# Altium PCB PCB2.PcbDoc
Units mm, origin at the board's own origin, x right, y up, seen from the top; angles counter-clockwise.
Board outline 52.5 x 30.5 mm, 2 copper layers (Top Layer, Bottom Layer), stack 0.8 mm thick; 43 components, 37 nets, 192 pads, 123 vias.
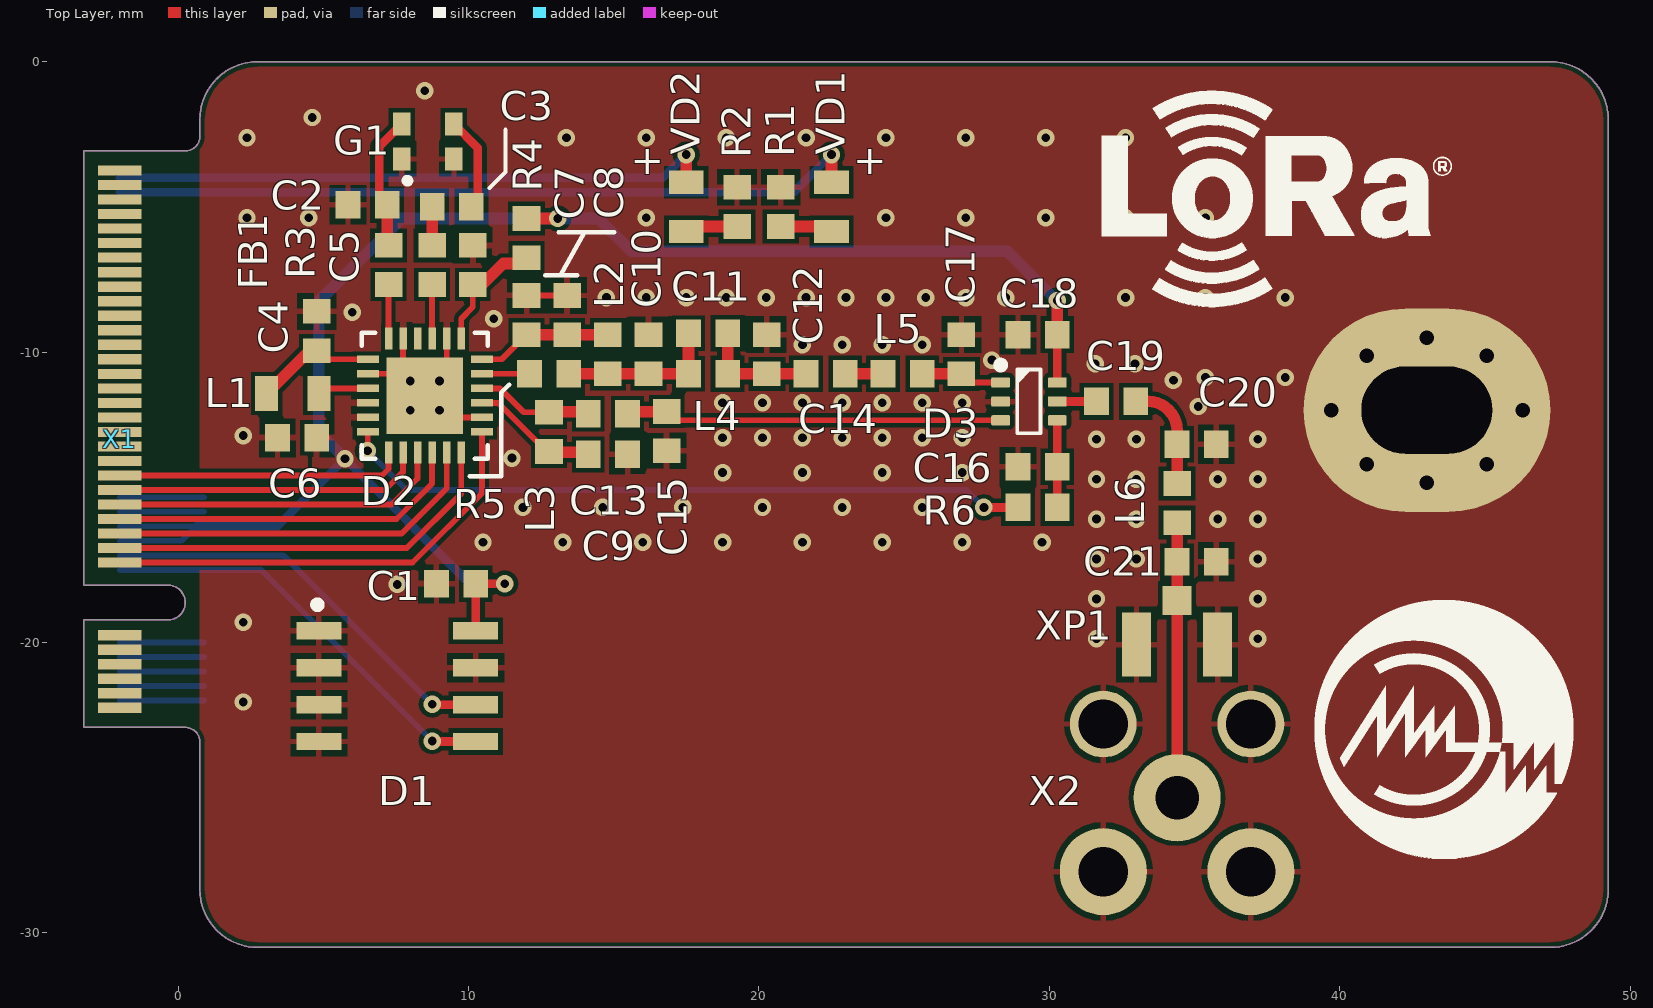
[diagram p0: Top Layer view]
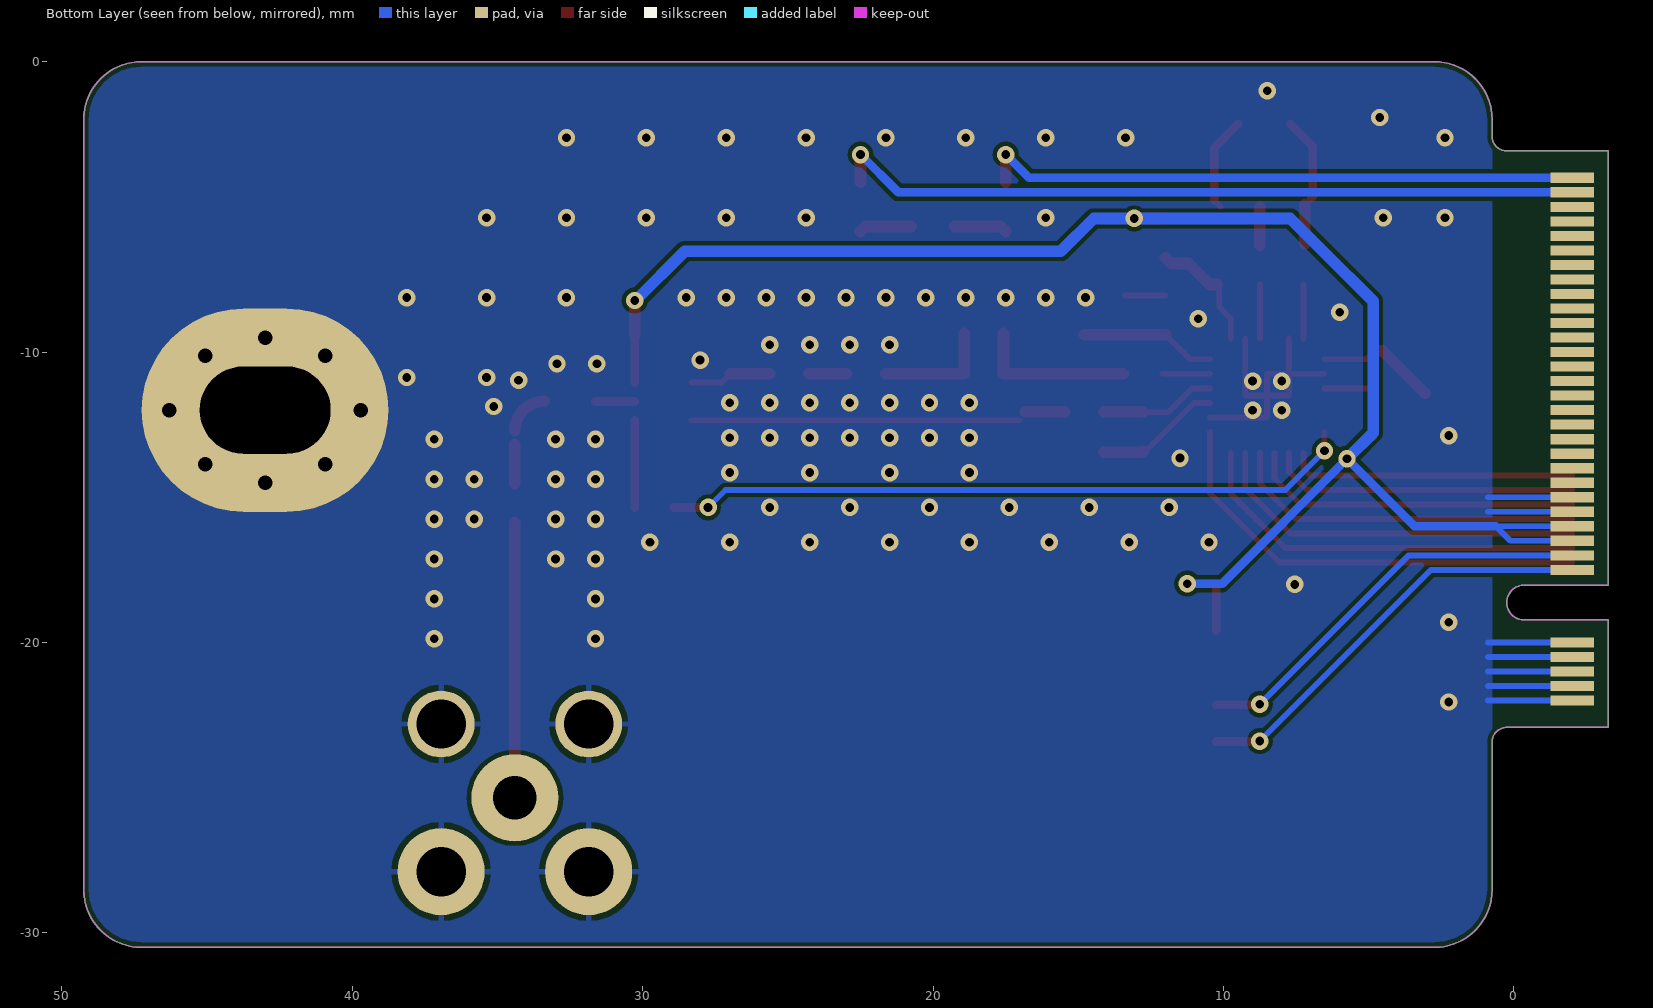
[diagram p1: Bottom Layer view, seen from below]
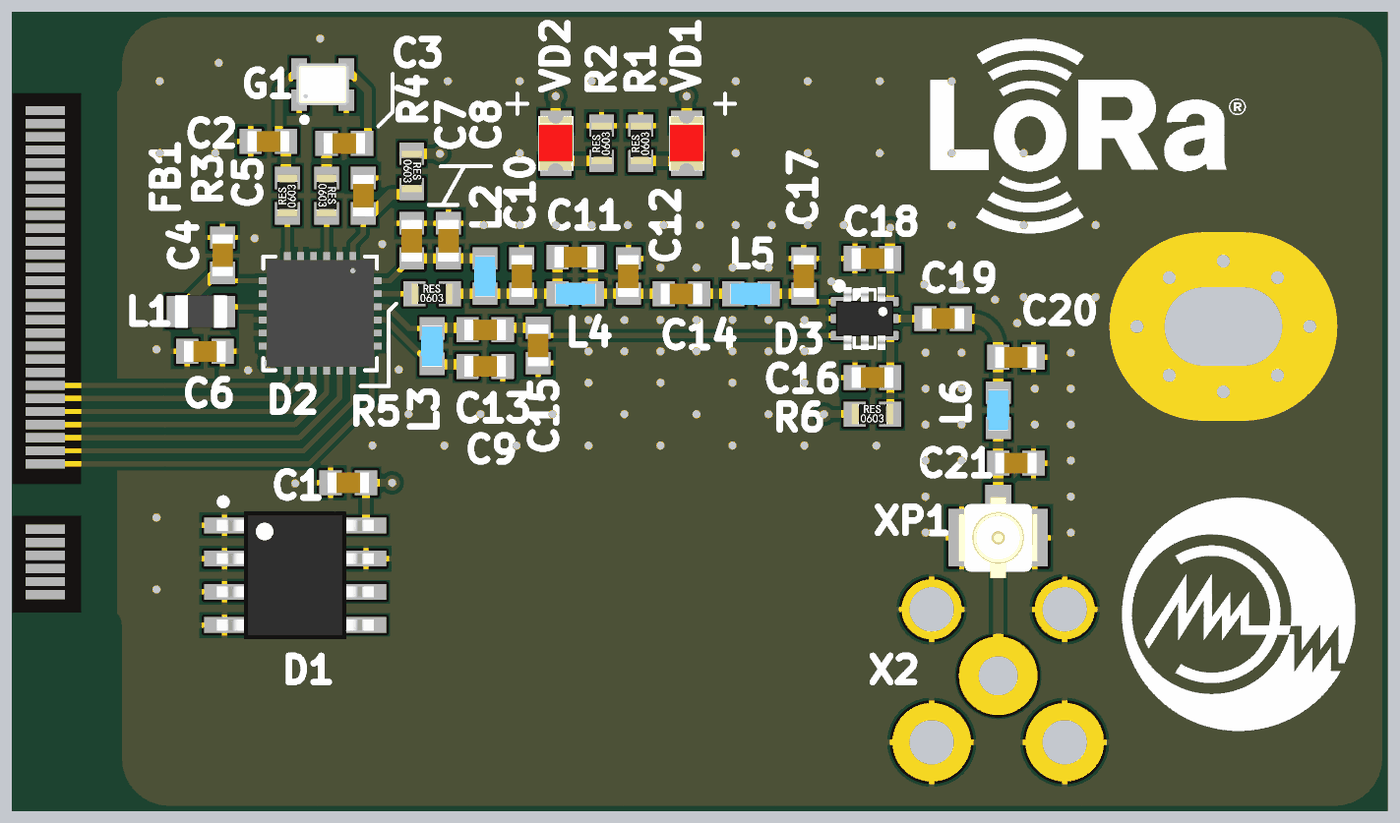
[diagram p2: 3D render of the assembled board from above, using the file's embedded part models]

## Layer stack, top to bottom
Top Solder: solder mask 0.01, Solder Resist, Dk 3.5
Top Layer: signal copper 0.035
Dielectric 1: dielectric 0.73, FR-4, Dk 4.6
Bottom Layer: signal copper 0.035
Bottom Solder: solder mask 0.01, Solder Resist, Dk 3.5

## Board outline
-3.25,-19.225 -0.35,-19.225 ccw(c-0.35,-18.625) -0.35,-18.025 -3.25,-18.025 -3.25,-3.075 0.25,-3.075 ccw(c0.25,-2.575) 0.75,-2.575 0.75,-2 cw(c2.75,-2) 2.75,0 47.25,0 cw(c47.25,-2) 49.25,-2 49.25,-28.5 cw(c47.25,-28.5) 47.25,-30.5 2.75,-30.5 cw(c2.75,-28.5) 0.75,-28.5 0.75,-23.425 ccw(c0.25,-23.425) 0.25,-22.925 -3.25,-22.925

## Design rules (kind name [scope] priority, off if disabled: settings)
Clearance [All] p1: gap=0.15 ignorepadtopadclearanceinfootprint=FALSE except(0: Arc-Hole Track-Hole SMDPad-Hole THPad-Hole Via-Hole Fill-Hole Poly-Hole Region-Hole Text-Hole)
ComponentClearance [All] p1: gap=0 collisioncheckmode=3 verticalgap=0.254 showdistances=FALSE
HoleSize [All] p1: absolutevalues=TRUE maxlimit=10 minlimit=0.3 maxpercent=80.000 minpercent=20.000
MinimumSolderMaskSliver [All] p1: minsoldermaskwidth=0.15
PolygonConnect PolygonConnect_1 [All vs (InNamedUnion('Mounting pad'))] p1: connectstyle=Direct reliefconductorwidth=0.254 reliefentries=4 polygonreliefangle="90 Angle" airgapwidth=0.254
PolygonConnect [All vs IsVia] p2: connectstyle=Direct reliefconductorwidth=0.2 reliefentries=4 polygonreliefangle="90 Angle" airgapwidth=0.2
PolygonConnect PolygonConnect_2 [All] p3: connectstyle=Relief reliefconductorwidth=0.2 reliefentries=4 polygonreliefangle="90 Angle" airgapwidth=0.2
RoutingVias [All] p1: holewidth=0.3 width=0.6 viastyle="Through Hole" minholewidth=0.3 minwidth=0.6 maxholewidth=0.6 maxwidth=1
SilkToSilkClearance [All] p1: silktosilkclearance=0
SilkToSolderMaskClearance [IsPad] p1: minsilkscreentomaskgap=0 clearancetoexposedcopper=TRUE
SolderMaskExpansion [All] p1: expansion=0.102 istentingtop=FALSE
Width [All] p1: maxlimit=0.5 minlimit=0.2 preferedwidth=0.2
25 further rules are at their usual default settings.

## Classes and differential pairs
component class Sheet1: C1 C2 C3 D1 FB1 G1 R1 R2 R3 VD1 VD2 X1 X2 XP1
component class Sheet2: C4 C5 C6 C7 C8 C9 C10 C11 C12 C13 C14 C15 C16 C17 C18 C19 C20 C21 D2 D3 L1 L2 L3 L4 L5 L6 R4 R5 R6

## Components (designator, comment, footprint, x,y, rotation, side; value= is the part's Value field where it differs from the comment)
C1 "C" С0603 9.575,-17.975 r180 top value="1 мк"
C2 "C" С0603 6.525,-4.925 r180 top value=0,1мк
C3 "C" С0603 9.425,-5 r180 top value="10 пФ"
C4 "C" С0603 4.775,-9.275 r270 top value=0,47мк
C5 "C" С0603 10.15,-7 r90 top value=1мк
C6 "C" С0603 4.1,-12.95 r180 top value=0,1мк
C7 "C" С0603 12,-8.725 r90 top value=47н
C8 "C" С0603 13.4,-8.725 r90 top value="47 п"
C9 "C" С0603 14.8,-13.525 r0 top value="1,8 п"
C10 "C" С0603 16.2,-10.075 r90 top value="5,6 п"
C11 "C" С0603 18.25,-9.35 r0 top value="3,3 п"
C12 "C" С0603 20.275,-10.075 r90 top value="5,6 п"
C13 "C" С0603 14.8,-12.125 r0 top value="2,4 п"
C14 "C" С0603 22.3,-10.75 r0 top value="39 п"
C15 "C" С0603 16.825,-12.725 r90 top value="2,2 п"
C16 "C" С0603 29.6,-13.95 r180 top value=1н
C17 "C" С0603 26.975,-10.075 r270 top value="2,2 п"
C18 "C" С0603 29.6,-9.4 r180 top value=0,1мк
C19 "C" С0603 32.3,-11.7 r0 top value="39 п"
C20 "C" С0603 35.075,-13.175 r0 top value="3,3 п"
C21 "C" С0603 35.075,-17.225 r0 top value="3,3 п"
D1 "AT24MAC402 SOIC-8" SOIC8 4.85,-19.6 r0 top
D2 "SX126x" QFN24_4X4_SEM 8.5,-11.5 r270 top
D3 "PE4259 SC-70" SC70-6 29.3,-11.7 r0 top
FB1 "Ferrite_Beads" R0603 7.25,-7 r90 top value=BLM18PG181SN1D
G1 "32MHz" OSC_2016 8.6,-2.75 r0 top value="NT2016SA 32MHz END4263A"
L1 "L" IND_0805 3.95,-11.425 r0 top value=15мк
L2 "L" INDC_0603 14.8,-10.075 r90 top value=47н
L3 "L" INDC_0603 12.775,-12.75 r90 top value=15н
L4 "L" INDC_0603 18.25,-10.75 r0 top value=2,5н
L5 "L" INDC_0603 24.95,-10.75 r0 top value=4,7н
L6 "L" INDC_0603 34.4,-15.2 r270 top value=9,1н
R1 "R" R0603 20.75,-5 r90 top value=220
R2 "R" R0603 19.25,-5 r90 top value=220
R3 "R" R0603 8.75,-7 r270 top value=220
R4 "R" R0603 12,-6.075 r270 top value=0
R5 "R" R0603 12.775,-10.75 r0 top value=0
R6 "R" R0603 29.6,-15.35 r0 top value=100
VD1 "LED" LED_0805 22.5,-5 r270 top
VD2 "LED" LED_0805 17.5,-5 r270 top
X1 "M.2" M.2_EDGE 0.75,-2.275 r90 top locked
X2 "SMA" SMA_kont 34.4,-25.349 r180 top
XP1 "IPEX" IPEX 34.4,-20.075 r90 top

## Footprints (in the part's own frame and the unit in brackets; to place one, negate y for a bottom-side part, rotate by r counter-clockwise, add the part's x,y. Pads: shape width x height; smd on the part's side, far side on the other; paste and mask are expansions set on the pad)
IND_0805 [mm]
  rect 0.8x1.2 smd: 1(-0.9,0) 2(0.9,0)
  body extent -1,-0.62 1,0.63, height 1.25
INDC_0603 [mm] "Chip Inductor, 2-Leads, Body 1,60x1,00mm, IPC Medium Density"
  rect 0.85x0.95 smd: 1(-0.675,0) 2(0.675,0)
  body extent -0.78,-0.42 0.79,0.42, height 0.59
IPEX [mm]
  rect 1x1 smd: 1(1.524,0)
  rect 2.2x1 smd: 2(0,1.397) 2(0,-1.397)
  body extent -1.55,-1.5 1.55,1.5, height 1.25
LED_0805 [mm]
  rect 0.8x1.2 smd: 1(-0.85,0) 2(0.85,0)
  body extent -1.05,-0.67 1.05,0.68, height 0.9
M.2_EDGE [mm]
  rect 0.35x1.5 smd: 1(-19.975,2.75) 2(-19.475,2.75) 3(-18.975,2.75) 4(-18.475,2.75) 5(-17.975,2.75) 6(-17.475,2.75) 7(-14.975,2.75) 8(-14.475,2.75) 9(-13.975,2.75) 10(-13.475,2.75) 11(-12.975,2.75) 12(-12.475,2.75) 13(-11.975,2.75) 14(-11.475,2.75) 15(-10.975,2.75) 16(-10.475,2.75) 17(-9.975,2.75) 18(-9.475,2.75) 19(-8.975,2.75) 20(-8.475,2.75) 21(-7.975,2.75) 22(-7.475,2.75) 23(-6.975,2.75) 24(-6.475,2.75) 25(-5.975,2.75) 26(-5.475,2.75) 27(-4.975,2.75) 28(-4.475,2.75) 29(-3.975,2.75) 30(-3.475,2.75) 31(-2.975,2.75) 32(-2.475,2.75) 33(-1.975,2.75) 34(-1.475,2.75)
  rect 0.35x1.5 smd far side: 35(-1.725,2.75) 36(-2.225,2.75) 37(-2.725,2.75) 38(-3.225,2.75) 39(-3.725,2.75) 40(-4.225,2.75) 41(-4.725,2.75) 42(-5.225,2.75) 43(-5.725,2.75) 44(-6.225,2.75) 45(-6.725,2.75) 46(-7.225,2.75) 47(-7.725,2.75) 48(-8.225,2.75) 49(-8.725,2.75) 50(-9.225,2.75) 51(-9.725,2.75) 52(-10.225,2.75) 53(-10.725,2.75) 54(-11.225,2.75) 55(-11.725,2.75) 56(-12.225,2.75) 57(-12.725,2.75) 58(-13.225,2.75) 59(-13.725,2.75) 60(-14.225,2.75) 61(-14.725,2.75) 62(-15.225,2.75) 63(-17.725,2.75) 64(-18.225,2.75) 65(-18.725,2.75) 66(-19.225,2.75) 67(-19.725,2.75)
  Keep-Out Layer lines w0.05: -21.45,0 -21.15,0 ccw(c-21.15,0.5) -20.65,0.5 -20.65,4 -16.95,4 -16.95,1.1 ccw(c-16.35,1.1) -15.75,1.1 -15.75,4 -0.8,4 -0.8,0.5 ccw(c-0.3,0.5) -0.3,0 0,0
OSC_2016 [mm]
  rect 0.6x0.8 smd: 1(0.9,-0.6) 2(-0.9,-0.6) 3(-0.9,0.6) 4(0.9,0.6)
  silkscreen extent -0.8,-1.45 -0.6,-1.25, body extent -1,-0.8 1,0.8, height 0.7
QFN24_4X4_SEM [mm]
  rect 0.757x0.255 smd paste+0 mask+0: 1(-1.966,1.25) 2(-1.966,0.75) 3(-1.966,0.25) 4(-1.966,-0.25) 5(-1.966,-0.75) 6(-1.966,-1.25) 13(1.966,-1.25) 14(1.966,-0.75) 15(1.966,-0.25) 16(1.966,0.25) 17(1.966,0.75) 18(1.966,1.25)
  rect 0.255x0.757 smd paste+0 mask+0: 7(-1.25,-1.966) 8(-0.75,-1.966) 9(-0.25,-1.966) 10(0.25,-1.966) 11(0.75,-1.966) 12(1.25,-1.966) 19(1.25,1.966) 20(0.75,1.966) 21(0.25,1.966) 22(-0.25,1.966) 23(-0.75,1.966) 24(-1.25,1.966)
  rect 2.642x2.642 smd paste-1.308 mask+0: 25(0,0)
  silkscreen extent -2.17,-2.17 2.17,2.17, body extent -2.04,-2.04 2.05,2.05, height 0.99
R0603 [mm]
  rect 0.85x0.95 smd: 1(-0.675,0) 2(0.675,0)
  body extent -0.8,-0.4 0.8,0.4, height 0.45
SC70-6 [mm] "SC70-6; SOT-363"
  round 0.254 on Mech15: 0(0,0)
  rrect25% 0.65x0.35 smd mask+0.07: 1(-0.975,0.65) 2(-0.975,0) 3(-0.975,-0.65) 4(0.975,-0.65) 5(0.975,0) 6(0.975,0.65)
  silkscreen extent -1.1,-1.1 0.4,1.38, body extent -1.2,-1.1 1.2,1.1, height 1.1
SMA_kont [mm]
  round 3 hole 1.5: 1(0,0)
  round 3 hole 1.7: 2(-2.54,2.54) 2(2.54,2.54)
  round 2.3 hole 1.7: 2(-2.54,-2.54) 2(2.54,-2.54)
SOIC8 [mm]
  rect 1.55x0.6 smd: 1(0,0) 2(0,-1.27) 3(0,-2.54) 4(0,-3.81) 5(5.4,-3.81) 6(5.4,-2.54) 7(5.4,-1.27) 8(5.4,0)
  Top Layer region: 0,0 0,0 0,0 0,0
  body extent -0.3,-4.36 5.7,0.54, height 1.75
С0603 [mm]
  rect 0.85x0.95 smd: 1(-0.675,0) 2(0.675,0)
  body extent -0.8,-0.4 0.8,0.4, height 0.9

## Part data
C1 C2 C6 C7 C18: Voltage="16 В"
C3 C8 C9 C10 C11 C13 C14 C15 C17 C19 C20 C21: Voltage="50 В"
C4 C5 C16: Voltage="10 В"
C12: Voltage=50
D1: library part AT24MAC402
D3: library part PE4259
G1: library part TCXO
VD1 VD2: library part VD_LED, Voltage=?
X2 XP1: library part 2pin

## Free pads (board coordinates)
  rrect100% 8.5x7 hole 3 slot 4.5 at 0 deg: 0(43,-12)

## Via types
v1: diameter 0.6, hole 0.3, Top Layer to Bottom Layer, tented both sides, 115 vias
v2: diameter 0.7, hole 0.5, Top Layer to Bottom Layer, tented both sides, 8 vias

## Nets (pads, with @x,y where several pads share a name; then routed paths per layer and width w, separated by ;. In a path a pad name is that pad's centre, name@x,y a point inside that pad or via, vN(x,y) a via of type N, cw(c..) or ccw(c..) an arc to the next point about the centre after c; other vN are vias at no path point)
3V3: C1.1 C6.1 C18.1 D1.8 D2.10 D2.11 D3.6 R4.1 X1.59 X1.60 | length 59.3
  Top Layer w0.2: C6.1@4.825,-12.95 C6.1@5.125,-12.95
  Top Layer w0.3: D1.8 C1.1 v1(11.25,-17.975) ; D3.6 C18.1
  Top Layer w0.4: R4.1 v1(13.075,-5.4) ; C18.1 v1(30.275,-8.225)
  Bottom Layer w0.2: X1.60 0.125,-16.5 0.625,-16 X1.59
  Bottom Layer w0.3: 0.625,-16 3.425,-16 v1(5.75,-13.675) 10.05,-17.975 v1(11.25,-17.975) ; 6.575,-6.525 6.65,-6.525
  Bottom Layer w0.4: v1(5.75,-13.675) 4.85,-12.775 4.85,-8.25 6.575,-6.525 7.7,-5.4 v1(13.075,-5.4) 14.475,-5.4 15.6,-6.525 28.55,-6.525 30.25,-8.225 v1(30.275,-8.225)
ANT: C21.1 L6.2 X2.1 XP1.1 | length 9.3
  Top Layer w0.4: X2.1@34.4,-25.174 C21.1 L6.2
EEPROM_SCL: D1.6 X1.61 | length 14.4
  Top Layer w0.3: v1(8.75,-22.125) 8.765,-22.14 D1.6
  Bottom Layer w0.2: X1.61 3.625,-17 v1(8.75,-22.125)
EEPROM_SDA: D1.5 X1.62 | length 14.7
  Top Layer w0.3: v1@8.765,-23.41 D1.5
  Bottom Layer w0.2: X1.62 2.855,-17.5 v1(8.75,-23.395)
GND: C1.2 C2.2 C4.1 C5.2 C6.2 C7.2 C8.2 C9.2 C10.2 C12.2 C15.1 C16.2 C17.1 C18.2 C20.2 C21.2 D1.1 D1.2 D1.3 D1.4 D1.7 D2.2 D2.5 D2.8 D2.20 D2.25 D3.2 G1.1 G1.2 pad.0 R1.2 R2.2 X1.57 X1.58 X1.63 X1.64 X1.65 X1.66 X1.67 X2.2 XP1.2 | length 32.6
  Top Layer w0.2: D2.8 D2.25@7.75,-10.75 ; D2.5 D2.25@7.75,-10.75 ; D2.2 9.25,-11.5 D2.25 ; D2.20 8.5,-12.25 D2.25 ; C7.2 C8.2 ; D2.25@7.75,-10.75 7.75,-11.5 D2.25 ; D2.25@7.75,-10.75 8.5,-10.75 D2.25
  Bottom Layer w0.2: X1.67 0.9,-22 ; X1.66 0.9,-21.5 ; X1.65 0.9,-21 ; X1.64 0.9,-20.5 ; X1.63 0.9,-20 ; X1.58 0.9,-15.5 ; X1.57 0.9,-15
  other v1: 2.25,-22.05 31.625,-19.875 37.175,-19.875 2.25,-19.3 31.625,-18.5 37.175,-18.5 7.55,-18 31.625,-17.125 33,-17.125 37.175,-17.125 10.5,-16.55 13.25,-16.55 16,-16.55 18.75,-16.55 21.5,-16.55 24.25,-16.55 27,-16.55 29.75,-16.55 31.625,-15.75 33,-15.75 35.8,-15.75 37.175,-15.75 11.875,-15.35 14.625,-15.35 17.375,-15.35 20.125,-15.35 22.875,-15.35 25.625,-15.35 31.625,-14.375 33,-14.375 35.8,-14.375 37.175,-14.375 18.75,-14.15 21.5,-14.15 24.25,-14.15 27,-14.15 11.5,-13.65 31.625,-13 33,-13 37.175,-13 18.75,-12.95 20.125,-12.95 21.5,-12.95 22.875,-12.95 24.25,-12.95 25.625,-12.95 27,-12.95 2.25,-12.875 8,-12 9,-12 35.125,-11.875 18.75,-11.75 20.125,-11.75 21.5,-11.75 22.875,-11.75 24.25,-11.75 25.625,-11.75 27,-11.75 8,-11 9,-11 34.275,-10.975 35.375,-10.875 38.125,-10.875 31.575,-10.4 32.95,-10.4 28.025,-10.275 21.5,-9.75 22.875,-9.75 24.25,-9.75 25.625,-9.75 10.875,-8.85 6,-8.625 14.75,-8.125 16.125,-8.125 17.5,-8.125 18.875,-8.125 20.25,-8.125 21.625,-8.125 23,-8.125 24.375,-8.125 25.75,-8.125 27.125,-8.125 28.5,-8.125 32.625,-8.125 35.375,-8.125 38.125,-8.125 2.375,-5.375 4.5,-5.375 16.125,-5.375 24.375,-5.375 27.125,-5.375 29.875,-5.375 32.625,-5.375 35.375,-5.375 2.375,-2.625 13.375,-2.625 16.125,-2.625 18.875,-2.625 21.625,-2.625 24.375,-2.625 27.125,-2.625 29.875,-2.625 32.625,-2.625 4.625,-1.925 8.5,-1
  other v2: 43,-14.5 40.932,-13.868 45.068,-13.868 39.7,-12 46.3,-12 40.932,-10.132 45.068,-10.132 43,-9.5
LED1: VD1.1 X1.36 | length 26
  Top Layer w0.4: VD1.1 v1(22.5,-3.2)
  Bottom Layer w0.3: X1.36 21.2,-4.5 v1(22.5,-3.2)
LED2: VD2.1 X1.35 | length 20.8
  Top Layer w0.4: VD2.1 v1(17.5,-3.2)
  Bottom Layer w0.3: X1.35 16.7,-4 v1(17.5,-3.2)
LORA_BUSY: D2.14 X1.12 | length 10.7
  Top Layer w0.2: X1.12 7.125,-14.75 7.75,-14.125 D2.14
LORA_DIO1: D2.13 X1.13 | length 9.9
  Top Layer w0.2: X1.13 7.025,-14.25 7.25,-14.025 D2.13
LORA_MISO: D2.16 X1.10 | length 12.3
  Top Layer w0.2: X1.10 7.525,-15.75 8.75,-14.525 D2.16
LORA_MOSI: D2.17 X1.9 | length 13.1
  Top Layer w0.2: X1.9 7.7,-16.25 9.25,-14.7 D2.17
LORA_NRST: D2.15 X1.11 | length 11.5
  Top Layer w0.2: X1.11 7.35,-15.25 8.25,-14.35 D2.15
LORA_NSS: D2.19 X1.7 | length 15.6
  Top Layer w0.2: X1.7 8.075,-17.25 10.466,-14.859 D2.19
LORA_SCK: D2.18 X1.8 | length 13.9
  Top Layer w0.2: X1.8 7.875,-16.75 9.75,-14.875 D2.18
NetC2_1: C2.1 FB1.2 G1.3 | length 4.6
  Top Layer w0.2: C2.1@6.975,-4.7 C2.1 ; FB1.2@7.2,-6.275 FB1.2
  Top Layer w0.3: C2.1@6.975,-4.7 6.925,-4.65 6.925,-2.925 G1.3
  Top Layer w0.4: FB1.2@7.2,-6.275 C2.1
NetC3_1: C3.1 G1.4 | length 3.3
  Top Layer w0.2: C3.1 C3.1@10.325,-4.775
  Top Layer w0.3: G1.4 10.325,-2.975 C3.1@10.325,-4.775
NetC3_2: C3.2 R3.1 | length 1.3
  Top Layer w0.4: R3.1 C3.2
NetC4_2: C4.2 D2.7 L1.1 | length 4.2
  Top Layer w0.2: C4.2 5.075,-10.25 D2.7
  Top Layer w0.4: L1.1 4.525,-9.95 C4.2
NetC5_1: C5.1 D2.1 R4.2 | length 4.3
  Top Layer w0.2: D2.1 9.75,-8.85 10.15,-8.45 C5.1 C5.1@10.225,-7.675
  Top Layer w0.4: C5.1@10.225,-7.675 10.475,-7.675 11.2,-6.95 11.8,-6.95 R4.2
NetC7_1: C7.1 C8.1 D2.24 L2.2 | length 4.7
  Top Layer w0.2: D2.24 11.15,-10.25 C7.1
  Top Layer w0.4: C7.1 C8.1 L2.2
NetC9_1: C9.1 D2.21 L3.1 | length 4.4
  Top Layer w0.2: D2.21 11.025,-11.75 12.7,-13.425 L3.1
  Top Layer w0.4: L3.1 12.8,-13.45 C9.1@14.125,-13.45
NetC10_1: C10.1 C11.1 L2.1 L4.1 R5.2 | length 5.5
  Top Layer w0.4: R5.2 L2.1 C10.1 L4.1 C11.1
NetC11_2: C11.2 C12.1 C14.1 L4.2 | length 4.1
  Top Layer w0.4: C11.2 L4.2 C12.1 C14.1
NetC13_1: C13.1 D2.22 L3.2 | length 4
  Top Layer w0.2: D2.22 11.075,-11.25 11.9,-12.075 L3.2
  Top Layer w0.4: L3.2 12.8,-12.05 C13.1@14.125,-12.05
NetC13_2: C13.2 C15.2 D3.3 | length 12.7
  Top Layer w0.2: C15.2@17.025,-12.35 D3.3
  Top Layer w0.4: C13.2@15.475,-12.05 C15.2
NetC14_2: C14.2 L5.1 | length 1.3
  Top Layer w0.4: C14.2 L5.1
NetC16_1: C16.1 D3.4 R6.2 | length 3
  Top Layer w0.3: R6.2 C16.1 D3.4
NetC17_2: C17.2 D3.1 L5.2 | length 2.8
  Top Layer w0.2: C17.2 27.275,-11.05 D3.1
  Top Layer w0.4: L5.2 C17.2
NetC19_1: C19.1 D3.5 | length 1.3
  Top Layer w0.3: D3.5 C19.1
NetC19_2: C19.2 C20.1 L6.1 | length 2.9
  Top Layer w0.4: C19.2@33.4,-11.7 cw(c33.4,-12.7) 34.4,-12.7 ; L6.1 C20.1
NetD2_9: D2.9 L1.2 | length 1.8
  Top Layer w0.2: L1.2 5.025,-11.25 D2.9
NetD2_12: D2.12 R6.1 | length 23.9
  Top Layer w0.2: v1@6.5,-13.425 v1(6.525,-13.4) 6.525,-13.25 6.534,-13.241 D2.12
  Top Layer w0.3: v1(27.75,-15.35) R6.1
  Bottom Layer w0.2: v1(6.525,-13.4) 7.875,-14.75 27.15,-14.75 v1(27.75,-15.35)
NetD2_23: D2.23 R5.1 | length 1.6
  Top Layer w0.2: D2.23 R5.1
NetR1_1: R1.1 VD1.2 | length 1.8
  Top Layer w0.4: R1.1 22.325,-5.675 VD1.2
NetR2_1: R2.1 VD2.2 | length 1.8
  Top Layer w0.4: VD2.2 17.675,-5.675 R2.1
TCXO_VDD: D2.6 FB1.1 | length 1.9
  Top Layer w0.2: D2.6 FB1.1
XTA: D2.3 R3.2 | length 1.9
  Top Layer w0.2: D2.3 R3.2
pads on no net: D2.4 D3.0 X1.1 X1.2 X1.3 X1.4 X1.5 X1.6 X1.14 X1.15 X1.16 X1.17 X1.18 X1.19 X1.20 X1.21 X1.22 X1.23 X1.24 X1.25 X1.26 X1.27 X1.28 X1.29 X1.30 X1.31 X1.32 X1.33 X1.34 X1.37 X1.38 X1.39 X1.40 X1.41 X1.42 X1.43 X1.44 X1.45 X1.46 X1.47 X1.48 X1.49 X1.50 X1.51 X1.52 X1.53 X1.54 X1.55 X1.56

## Polygon pours and split planes (outlines as drawn)
GND on Top Layer "GND" (solid, pour order 2): 0.75,-30.5 0.75,0 44.575,0 49.25,0 49.25,-30.5 44.7,-30.5
3V3 on Top Layer "3V3" (solid, pour order 0): 4.625,-14 6.375,-14 6.375,-11.5 4.625,-11.5
GND on Bottom Layer "GND" (solid, pour order 4): 0.75,-30.5 0.75,0 44.575,0 49.25,0 49.25,-30.5 44.7,-30.5

## Keep-outs
Keep-Out Layer:
  lines w0.05: 0.75,-23.725 0.75,-28.5 ccw(c2.75,-28.5) 2.75,-30.5 47.25,-30.5 ccw(c47.25,-28.5) 49.25,-28.5 49.25,-2 ccw(c47.25,-2) 47.25,0 2.75,0 ccw(c2.75,-2) 0.75,-2 0.75,-2.275

## Silkscreen, mask and mechanical layers (free items; w line width, h text height)
Top Overlay:
  drawing of 23 lines, arcs and shapes, not listed
  text "+" at 16.75,-3.875 h1
  text "+" at 23.25,-3.875 h1